# EAGLE board LegoCar1 (EAGLE 7.5.0)
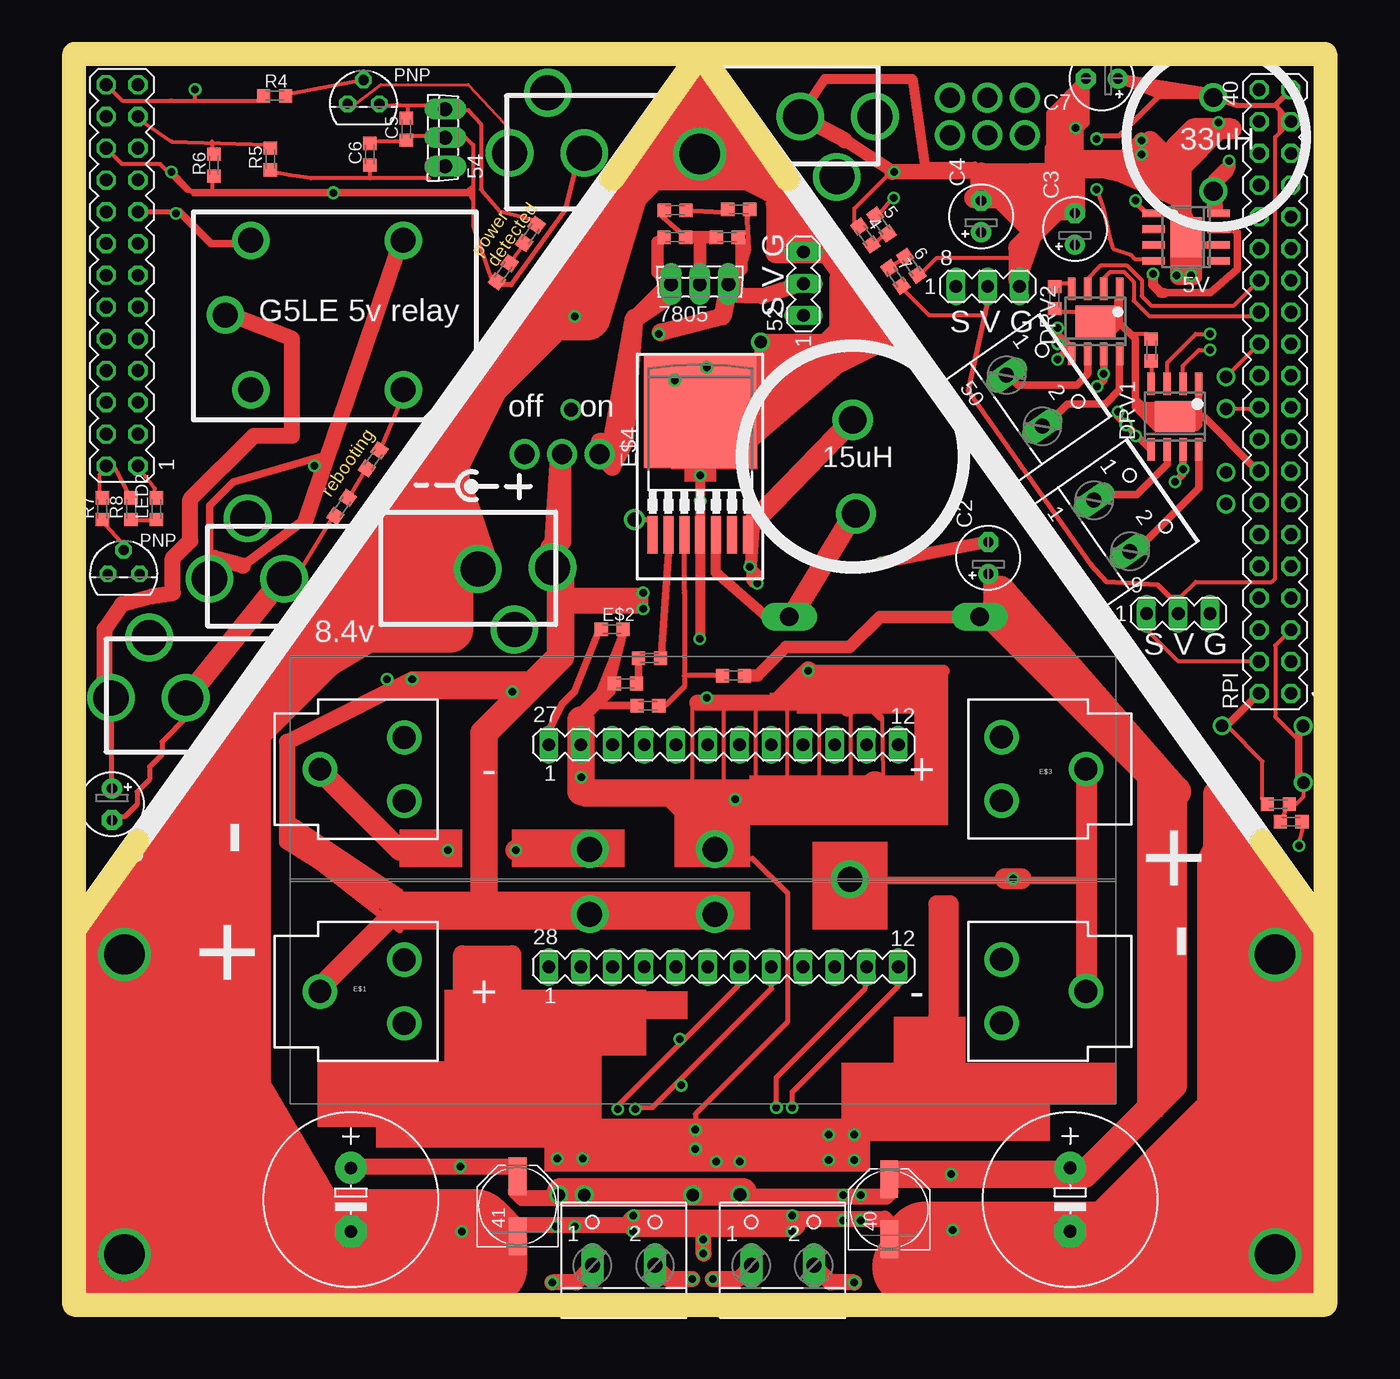
[diagram p0: board, top side]
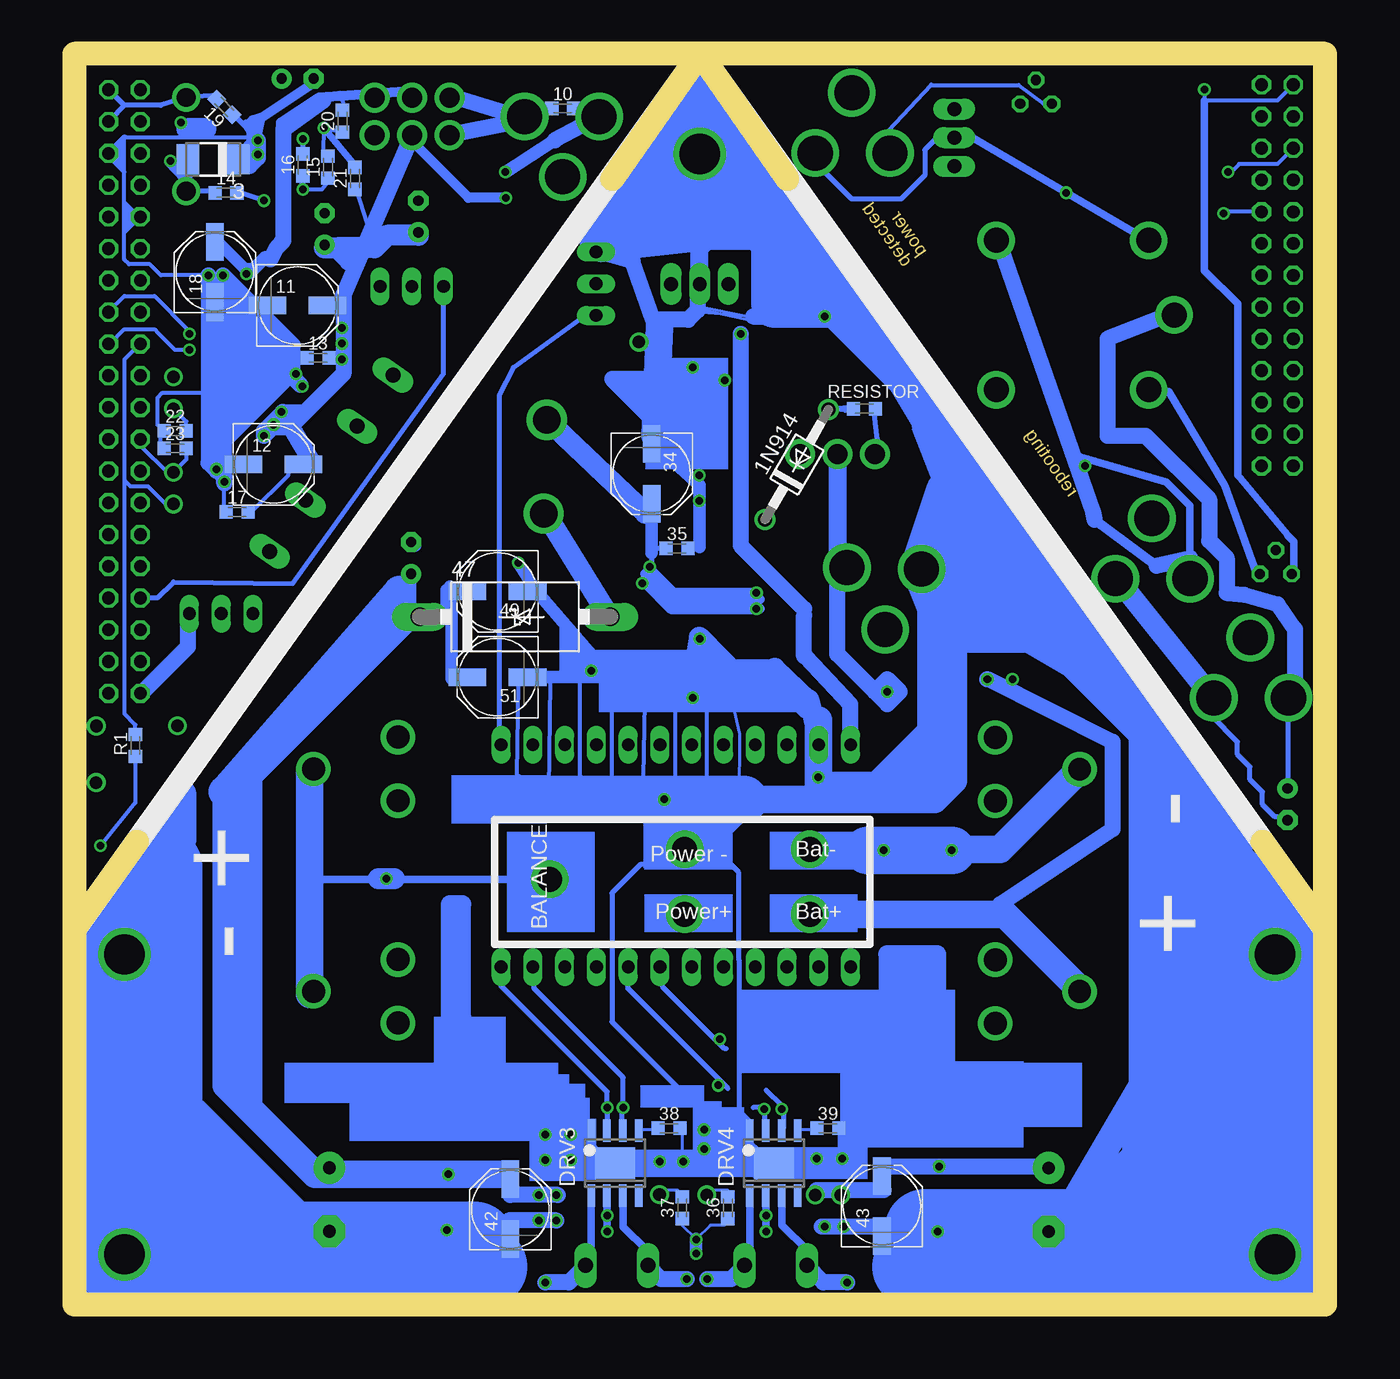
[diagram p1: board, bottom side, seen from below]

Size 100 x 100 mm. Coordinates in mm from the lower left corner, seen from the top.
Outline: 0,30 0,0 100,0 100,30
Outline: 0,30 0,100 50,100
Outline: 50,100 100,100 100,30
Outline: 50,100 43,90
Outline: 50,100 57,90
Outline: 0,30 5,37
Outline: 95,37 100,30
Copper layers (1*16): Top 0.035mm / dielectric 1.5mm / Bottom 0.035mm
Design rules "default": minimum track width 10mil, minimum drill 24mil, track to track 8mil, track to pad 8mil, pad to pad 8mil, via to via 8mil, smd to smd 8mil, copper to edge 40mil, drill to drill 8mil, minimum pad ring 10mil, minimum via ring 8mil, stop-mask expansion 4mil, vias tented up to drill 0mil, thermal gap 10mil
Holes 1 mm at 25,65 76,64

## Footprints (pad centres in the part's own frame; a part is rotated, then mirrored left to right if it is on the bottom)
W237-102 = drill 1.194 long: 1 -2.5,-1.27; 2 2.5,-1.27
DO41-10 = drill 1.118: A 5.08,0; C -5.08,0
DO-214AC = smd 1.8 x 2.4: A 2.025,0; C -2.025,0
C0603K = smd 1.05 x 1.08: 1 -0.875,0; 2 0.875,0
HSOP8 = smd 0.6 x 1.8: 1 -1.905,-2.6; 2 -0.635,-2.6; 3 0.635,-2.6; 4 1.905,-2.6; 5 1.905,2.6; 6 0.635,2.6; 7 -0.635,2.6; 8 -1.905,2.6 | smd 3.2 x 2.51: EXP 0,0
MA03-1 = drill 1.016 long: 1 -2.54,0; 2 0,0; 3 2.54,0
PANASONIC_D = smd 3 x 1.4: + 2.4,0; - -2.4,0
MA12-1 = drill 1.016 long: 1 -13.97,0; 2 -11.43,0; 3 -8.89,0; 4 -6.35,0; 5 -3.81,0; 6 -1.27,0; 7 1.27,0; 8 3.81,0; 9 6.35,0; 10 8.89,0; 11 11.43,0; 12 13.97,0
DO201T15 = drill 1.499 long: A 7.62,0; C -7.62,0
MA13-2 = drill 1.016 octagon: 1 -15.24,-1.27; 2 -15.24,1.27; 3 -12.7,-1.27; 4 -12.7,1.27; 5 -10.16,-1.27; 6 -10.16,1.27; 7 -7.62,-1.27; 8 -7.62,1.27; 9 -5.08,-1.27; 10 -5.08,1.27; 11 -2.54,-1.27; 12 -2.54,1.27; 13 0,-1.27; 14 0,1.27; 15 2.54,-1.27; 16 2.54,1.27; 17 5.08,-1.27; 18 5.08,1.27; 19 7.62,-1.27; 20 7.62,1.27; 21 10.16,-1.27; 22 10.16,1.27; 23 12.7,-1.27; 24 12.7,1.27; 25 15.24,-1.27; 26 15.24,1.27
C369-2 = drill 1.118 long: B -2.286,-1.397; C 0,-1.397; E 2.286,-1.397
E2,5-5 = drill 0.813 pad 1.6: + -1.27,0 | drill 0.813 pad 1.6 octagon: - 1.27,0
BATTERY_18650-HOLDER = drill 1.829: GND@1 30.628,0.01; GND@2 23.88,2.55; GND@3 23.88,-2.53; PWR@1 -30.628,-0.01; PWR@2 -23.88,2.53; PWR@3 -23.88,-2.55
P-TO263-7-1 = smd 0.8 x 3: 1 -3.81,-3.475; 2 -2.54,-3.475; 3 -1.27,-3.475; 4 0,-3.475; 5 1.27,-3.475; 6 2.54,-3.475; 7 3.81,-3.475 | smd 9 x 9: TH 0,6.35
E5-13 = drill 1.016 pad 2.54: + -2.54,0 | drill 1.016 pad 2.54 octagon: - 2.54,0
TO92 = drill 0.813 octagon: 1 -1.27,0; 2 0,1.905; 3 1.27,0
MA20-2 = drill 1.016 octagon: 1 -24.13,-1.27; 2 -24.13,1.27; 3 -21.59,-1.27; 4 -21.59,1.27; 5 -19.05,-1.27; 6 -19.05,1.27; 7 -16.51,-1.27; 8 -16.51,1.27; 9 -13.97,-1.27; 10 -13.97,1.27; 11 -11.43,-1.27; 12 -11.43,1.27; 13 -8.89,-1.27; 14 -8.89,1.27; 15 -6.35,-1.27; 16 -6.35,1.27; 17 -3.81,-1.27; 18 -3.81,1.27; 19 -1.27,-1.27; 20 -1.27,1.27; 21 1.27,-1.27; 22 1.27,1.27; 23 3.81,-1.27; 24 3.81,1.27; 25 6.35,-1.27; 26 6.35,1.27; 27 8.89,-1.27; 28 8.89,1.27; 29 11.43,-1.27; 30 11.43,1.27; 31 13.97,-1.27; 32 13.97,1.27; 33 16.51,-1.27; 34 16.51,1.27; 35 19.05,-1.27; 36 19.05,1.27; 37 21.59,-1.27; 38 21.59,1.27; 39 24.13,-1.27; 40 24.13,1.27

## Placement (x,y rotation side)
1  [W237-102]  84,63 305 top
1N914  [DO41-10]  42.23,67.17 60 bottom
3  [DO-214AC]  88.9,91.57 180 bottom
4  [C0603K]  63.25,85.47 305 top
5  [C0603K]  64.52,86.36 305 top
5V  TPS5410  [HSOP8]  88.89,85.35 90 top
6  [C0603K]  66.93,83.06 305 top
7  [C0603K]  65.66,82.17 305 top
8  [MA03-1]  73.03,81.41 0 top
9  [MA03-1]  88.27,55.24 0 top
10  [C0603K]  60.96,95.63 0 bottom
11  [PANASONIC_D]  82.17,79.88 0 bottom
12  [PANASONIC_D]  84.07,67.18 0 bottom
13  [C0603K]  80.52,75.69 0 bottom
14  [C0603K]  87.88,88.9 0 bottom
15  [C0603K]  79.72,90.94 90 bottom
16  [C0603K]  81.75,91.12 90 bottom
17  [C0603K]  87,63.37 0 bottom
18  [PANASONIC_D]  88.77,82.55 90 bottom
19  [C0603K]  88.01,95.76 135 bottom
20  [C0603K]  78.56,94.62 90 bottom
21  [C0603K]  77.56,90.04 90 bottom
22  [C0603K]  91.95,69.85 0 bottom
23  [C0603K]  91.95,68.45 0 bottom
24  [W237-102]  43.92,4.4 0 top
25  [W237-102]  56.62,4.4 0 top
27  [MA12-1]  51.91,44.77 0 top
28  [MA12-1]  51.91,26.99 0 top
30  [C0603K]  52.2,85.34 0 top
31  [C0603K]  48.01,85.34 0 top
32  [C0603K]  48.04,87.5 0 top
33  [C0603K]  53.12,87.57 0 top
34  470uf  [PANASONIC_D]  53.85,66.42 270 bottom
35  .1uf  [C0603K]  51.82,60.45 0 bottom
36  [C0603K]  47.75,7.75 90 bottom
37  [C0603K]  51.4,7.75 90 bottom
38  [C0603K]  52.45,14.1 0 bottom
39  [C0603K]  39.75,14.1 0 bottom
40  [PANASONIC_D]  65.15,7.62 90 top
41  [PANASONIC_D]  35.43,7.87 90 top
42  [PANASONIC_D]  65.15,7.62 90 bottom
43  [PANASONIC_D]  35.43,7.87 90 bottom
44  3k  [C0603K]  45.97,51.69 0 top
45  .2uf  [C0603K]  44.07,49.66 0 top
46  2k  [C0603K]  45.85,47.88 0 top
47  1n5822  [DO201T15]  64.77,54.99 0 bottom
48  18k  [C0603K]  52.7,50.29 0 top
49  [PANASONIC_D]  66.17,57.02 180 bottom
50  [W237-102]  77,73 305 top
51  [PANASONIC_D]  66.17,50.16 180 bottom
52  [MA03-1]  58.29,81.63 90 top
53  [MA13-2]  3.81,82.3 90 top
54  [C369-2]  28.25,93.31 90 top
60  [C0603K]  34.29,82.54 55 top
61  [C0603K]  36.45,85.59 55 top
62  [C0603K]  23.9,67.57 55 top
67  [C0603K]  21.36,63.78 55 top
7805  [C369-2]  50,83 0 top
C1  [E2,5-5]  3,40 270 top
C2  [E2,5-5]  73.07,59.7 90 top
C3  [E2,5-5]  80,86 90 top
C4  [E2,5-5]  72.5,87 90 top
C5  [C0603K]  26.54,93.98 90 top
C6  [C0603K]  23.63,91.96 90 top
C7  [E2,5-5]  82.15,98.03 180 top
DRV1  [HSOP8]  88,71 0 top
DRV2  [HSOP8]  81.65,78.62 0 top
DRV3  [HSOP8]  56.78,11.31 0 bottom
DRV4  [HSOP8]  44.08,11.31 0 bottom
E$1  [BATTERY_18650-HOLDER]  50.25,25.04 0 top
E$2  [C0603K]  43,54 0 top
E$3  [BATTERY_18650-HOLDER]  50.25,42.82 180 top
E$4  [P-TO263-7-1]  50.04,65.02 0 top
E$8  [E5-13]  79.61,8.4 270 top
E$9  [E5-13]  22.1,8.38 270 top
LED  [C0603K]  97.28,38.61 0 top
LED2  [C0603K]  6.56,63.63 90 top
PNP  [TO92]  3.94,58.42 0 top
PNP2  [TO92]  23.11,96.01 0 top
PULLDOWN  100k  [C0603K]  96.27,40.01 0 top
R1  220ohm  [C0603K]  95.12,44.7 90 bottom
R2  [C0603K]  86.11,76.33 90 top
R3  [C0603K]  78.36,80.52 90 top
R4  [C0603K]  16,96.65 0 top
R5  [C0603K]  15.66,91.6 90 top
R6  [C0603K]  11.16,91.1 90 top
R7  [C0603K]  2.22,63.63 90 top
R8  [C0603K]  4.53,63.63 90 top
RESISTOR  [C0603K]  36.83,71.63 0 bottom
RPI  [MA20-2]  96,73 90 top

## Library data of the parts
1 24 25 50 = con-wago-500
1N914 3 47 = diode
4-7 LED PULLDOWN R1-R3 = resistor
5V DRV1-DRV4 = st-microelectronics
8 9 27 28 52 53 RPI = con-lstb
10 13-17 19-23 30-33 54 7805 E$2 LED2 R5-R8 RESISTOR = ref-packages
11 12 18 34-43 49 51 60-62 67 C1-C7 E$8 E$9 R4 = rcl
44-46 48 = ref-packages-longpad
E$1 E$3 = SparkFun-Electromechanical
E$4 = led
PNP PNP2 = linear

## Nets
S$70: 9.1
S$195: 52.2
S$249: E$8.-
S$287: 47.C

## Tracks (layer width: path | path; a pad name or v marks a point on that pad's centre or on a via)
GROUND
  Top 1.27: 82.42,90.68 81.75,90.68 65.41,90.55
S$1
  Bottom 0.254: 45.99,78.95 49.96,79.74
S$2  (via drill 3.2)
  other vias: 96,28
S$3  (via drill 3.2)
  Top 6.452: 67,3 97,3 v96,4 96,30 93,33 | 93,33 93,35 | 93,33 93,12 92,13 92,14 83,5 68,5 69,4 87,4 92,9 93,9
  Bottom 6.452: 95.89,28.07 96,27.95 96,5 | 96,5 v96,4 95,3 67,3 | 93,9 93,14 | 93,25 93,35 95,33 95,30 96,29 97,29 93,25 | 93,25 93,14 | 93,14 92,14 83,5 | 83,5 68,5 | 83,5 96,5
S$4  (via drill 3.2)
  other vias: 4,4
S$5  (via drill 3.2)
  other vias: 4,28
S$6
  Top 0.305: 97.28,53.98 96.01,52.7 96.01,46.99 97.79,45.21 97.79,45.85 98.17,46.23
S$7
  Top 0.61: 89.92,72.77 89.92,72.39 | 89.92,72.39 89.92,70.36 89.66,70.1 | 89.66,70.36 89.66,72.14 89.92,72.39
S$8
  Top 0.61: 83.44,80.26 83.44,78.23 82.93,77.72
S$9
  Top 0.61: 86.61,70.74 86.49,70.74 84.84,72.39 | 83.57,80.39 83.57,78.49 84.84,77.22 84.84,72.39 | 84.84,72.39 84.84,71.75 86.49,70.1
S$10
  Top 0.61: 85.47,71.88 86.74,71.88 86.23,71.37
S$11
  Top 0.61: 94.61,66.93 94.36,66.93 90.3,70.99 89.92,70.99 89.79,70.87
S$12
  Top 0.61: 97.92,45.59 97.92,42.16
S$13
  Top 0.61: 91.82,46.23 92.08,46.23 94.74,48.9
S$14
  Top 0.61: 94.74,48.51 95,48.51
S$15
  Top 0.305: 98.04,42.16 98.04,41.78 98.17,41.66
S$16
  Bottom 0.305: 93.34,70.36 93.34,72.52 92.96,72.9 89.53,72.9
S$17  (via drill 0.6)
  Top 0.305: v97.92,36.7 98.3,38.35
  Bottom 0.305: 95.12,43.31 95.12,40.13 v97.92,36.7
S$18
  Top 0.305: 96.52,38.73 96.9,39.62 97.66,40.01 98.3,40.64 98.3,41.53
S$19
  Top 0.305: 95,40.39 95,43.43 92.33,46.1
S$20
  Top 0.305: 78.74,79.38 80.64,79.38
S$21
  Top 0.305: 78.74,81.66 79.76,81.66
S$22
  Top 0.305: 85.72,77.6 84.33,77.6
S$23
  Top 0.305: 86.11,75.06 86.11,74.3
S$24  (via drill 0.6)
  Top 0.61: 88.65,67.56 88.65,66.42 v88.01,65.79
  Bottom 0.406: 81.66,75.69 82.55,75.69
  Bottom 1.27: 88.01,65.66 88.01,66.17 v88.65,66.8 88.65,68.45 88.01,69.09 | v88.01,65.79 88.01,69.09 | 88.01,69.09 82.55,74.55 | 82.55,74.55 82.55,74.17 81.92,73.53 | 82.55,74.55 82.55,75.69 82.55,76.71 v88.14,82.3
S$25  (via drill 0.6)
  other vias: 82.3,74.42
S$26  (via drill 0.6)
  Top 0.61: 82.3,75.18 82.3,73.91 v81.79,73.41
S$27
  Top 1.016: 65.66,90.55 78.06,90.55 | 78.06,90.55 82.68,90.55 | 78.06,92.46 78.06,90.55
S$28
  Top 0.61: 83.57,75.18 83.57,73.15 82.42,72.01 79.38,72.01 78.11,70.74
S$29
  Top 0.61: 81.03,75.06 81.03,74.42 80.14,73.53 75.44,73.53 74.8,74.17
S$30
  Top 0.61: 89.92,67.56 89.92,65.28 85.6,60.96
S$31
  Top 0.61: 87.38,67.56 87.38,67.18 84.96,64.77 82.04,64.77 81.53,64.26
S$32
  Top 1.27: 82.55,90.68 83.57,90.42 88.01,88.52 89.03,86.49
S$33  (via drill 0.6)
  other vias: 84.07,70.36
S$34  (via drill 0.6)
  Top 0.61: v83.44,71.37 83.44,70.99 85.98,68.45
S$35  (via drill 0.6)
  Bottom 1.27: 72.98,93.61 78.49,80.77 78.49,74.42 81.53,71.37 | 81.53,71.37 82.8,70.1 84.2,70.1 v84.84,69.47 84.84,69.85 83.31,71.37 81.53,71.37
S$36  (via drill 0.6)
  Top 0.61: v78.61,78.11 78.61,77.6 79.38,76.83 | v78.61,75.56 79.63,76.58 79.38,76.83 | v78.61,76.83 79.38,76.83
S$37  (via drill 2.8)
  Top 1.016: 65.53,90.55 61.59,93.09
  Top 1.27: 61.59,93.09 v58.04,95
  Bottom 1.016: 61.59,93.09 65.53,90.55
  Bottom 1.27: v58.04,95 61.59,93.09
S$38
  Bottom 1.27: 64.26,94.49 65.02,94.49 | 65.02,94.49 70.03,93.49 | 65.02,94.49 64.52,95 69.49,96.5 70.27,96.27
S$39  (via drill 0.6)
  other vias: 65.53,90.55
S$40
  Bottom 0.305: 82.93,66.67 82.93,66.29 85.85,63.37
S$41
  Top 1.27: 88.27,82.42 88.27,84.07
S$42
  Top 0.305: 82.17,81.92 82.8,82.55 83.95,82.55 84.71,81.79 84.71,80.26 85.22,79.76 85.34,79.63 85.98,78.99 94.49,78.99
S$43
  Top 1.27: 89.53,82.3 89.53,83.95
S$44  (via drill 0.6)
  Bottom 0.305: v89.28,82.3 93.09,82.3 93.98,83.19 95.63,83.19 96.01,83.57 96.01,85.72 | 96.01,88.14 96.01,90.55 | 96.01,90.55 97.41,91.95 | 96.01,90.55 96.01,93.34 | 94.87,86.87 94.74,86.87 96.01,88.14 | 94.87,86.87 96.01,85.72 | 96.01,85.72 96.01,88.14 | 94.87,86.87 95.12,86.87 95.89,87.63 95.89,86.23 95.76,86.11 95.76,86.36 95.25,86.87 95.63,87.25 95.63,86.74 95.76,86.61 95.63,86.61 95.38,86.87 95.5,87 95.63,87 95.76,86.87
  Bottom 0.406: 96.01,93.34 97.41,91.95
  Bottom 1.27: v89.28,82.3 89.28,67.31 88.65,66.67 88.65,81.79 88.77,81.92 88.77,81.53 83.44,76.2 83.44,74.93 88.14,70.23 88.14,79.25 87.88,79.5 87.88,79.12 84.33,75.56 84.33,75.06 87.5,71.88 87.5,77.09 87.25,77.34 87.25,77.09 85.47,75.31 85.47,75.06 86.87,73.66 86.87,75.18 86.36,75.69
S$45
  Top 1.27: 89.53,82.17 88.27,82.17
S$46
  Top 0.61: 90.68,84.71 89.53,84.71
S$47
  Top 0.61: 92.2,85.98 92.71,85.98 92.96,85.72 92.96,82.8 90.81,80.9 87.12,80.9 | 86.87,80.9 86.74,80.9
  Top 0.813: 86.23,82.3 86.23,81.53 86.87,80.9 87.12,80.9
S$48
  Top 0.305: 80.9,81.92 82.04,83.06 84.2,83.06 85.34,81.92 85.34,80.64 86.11,79.88 92.71,79.88 94.61,81.79
S$49
  Bottom 1.27: 84.33,83.57 83.78,84.57 83.27,85.07 83.27,93.98 80.1,96.27
S$50  (via drill 0.6)
  Bottom 0.813: 86.36,82.42 v86.23,82.42 | v86.23,82.42 85.85,82.42 84.45,83.82 | 84.45,83.82 83.53,85.32 | 84.45,83.82 84.84,83.82 85.85,82.8 v86.23,82.42
  Bottom 1.016: 85.85,82.8 86.36,82.8 88.9,85.34
S$51
  Bottom 0.305: 88.01,63.5 88.01,65.53
S$52  (via drill 0.6)
  Top 0.61: v80.06,94.08 75.56,81.15
  Bottom 0.305: 80.1,92.08 v80.06,94.08 78.56,93.73
  Bottom 0.61: v80.06,94.08 77.56,91.06
S$53
  Top 1.676: 88.5,91 91.5,94
S$54
  Top 0.406: 88.14,56.52 87.63,56.52 86.61,57.53 82.55,57.78 81.28,59.18 71.5,73.03 73.03,80.14
S$55  (via drill 0.6)
  other vias: 85.34,91.95
S$56  (via drill 0.6)
  Top 1.27: 85.09,89.92 v85.34,93.09
  Bottom 1.27: v85.34,93.09 85.34,91.69 85.98,91.06 85.98,92.46 v85.34,93.09
S$57
  Bottom 1.27: 90.93,54.23 90.93,52.58 94.74,48.77
S$58
  Top 0.305: 88.39,56.52 89.66,57.78 95.76,57.78 96.01,58.04 96.01,93.34 96.9,94.23
S$59  (via drill 0.6, 1.5)
  Top 1.016: v92.33,91.44 92.33,90.93 91.31,89.92
  Top 1.27: 91.19,87.76 91.19,89.79 91.31,89.92 92.08,90.68
  Bottom 0.406: 91.57,91.44 v92.33,91.44 | 89.15,89.03 v91.06,89.03
  Bottom 1.016: v91.06,89.03 91.06,90.04 v92.33,91.44
S$60
  Bottom 0.305: 96.14,92.84 96.27,92.84 97.16,91.95 96.14,90.93 96.14,92.71 96.9,91.95 96.77,91.95 96.27,91.44 96.27,92.2 96.39,92.33 96.39,92.08 96.52,91.95 96.52,91.82
S$61  (via drill 0.6)
  Bottom 0.406: v84.84,88.27 86.74,88.9
S$62
  Top 0.254: 85.98,82.17 85.85,82.17
S$63
  Bottom 0.406: 62.1,95.63 63.12,95.63
S$64
  Bottom 0.406: 59.69,95.63 58.55,95.63
S$65
  Bottom 0.61: 58.67,7.87 58.67,4.06
S$66
  Bottom 0.61: 56.13,7.87 56.13,6.22 54.23,4.32
S$67
  Bottom 1.422: 80.9,67.18 83.31,71.25
S$68
  Bottom 0.406: 79.38,75.82 78.36,75.82
S$69
  Top 0.406: 84.71,88.27 85.72,87.25
S$70
  Top 0.305: 94.49,51.44 88.27,51.44 85.72,53.98 9.1
S$71  (via drill 0.6)
  Bottom 0.406: v81.75,93.22 81.75,92.2
S$72
  Bottom 0.305: 97.28,79.38 96.01,80.64 93.6,80.64 90.81,77.85 90.81,77.47
S$73
  Bottom 0.406: 85.47,93.34 87.12,95
S$74  (via drill 1.5)
  Top 0.406: 81.75,93.47 83.57,93.47 86.74,96.65 v91.06,96.52
  Bottom 0.406: 88.77,96.65 89.03,96.65 v91.06,96.52
S$75  (via drill 0.6)
  Top 0.305: 87.38,74.42 87.38,75.31 89.66,77.6 v90.81,77.6
S$76  (via drill 0.6)
  Top 0.305: 88.65,74.42 88.65,75.06 89.92,76.33 v90.81,76.33
  Bottom 0.305: 97.16,76.83 96.01,77.98 93.6,77.98 93.34,77.72 91.95,76.33 v90.81,76.33
S$77  (via drill 0.6)
  Top 0.305: v81.75,89.15 82.27,87.63 82.77,85.21 83.03,84.45 84.45,83.95 84.84,83.57 85.6,83.57
  Bottom 0.305: 79.72,90.42 79.72,89.79 80.22,89.15 v81.75,89.15
  Bottom 0.406: 81.75,89.79 v81.75,89.15
S$78
  Bottom 0.305: 81.88,90.17 81.88,89.15
S$79
  Bottom 0.406: 94.74,56.52 93.34,56.52 92.08,57.78 82.55,57.66 70.48,74.42 70.48,80.39
S$80
  Bottom 0.305: 95.89,93.34 85.72,93.34
S$81
  Bottom 0.305: 77.45,89.27 77.45,89.02 76.35,85.61
S$82
  Bottom 0.305: 78.45,95.89 78.72,96.89 80.35,96.52
S$83
  Top 0.305: 66.29,81.15 68.33,79.12 72.77,79.12
S$84
  Top 0.305: 65.53,83.19 65.79,83.31 66.17,83.57
S$85
  Top 0.305: 67.69,82.55 67.82,82.55 68.96,83.69 75.94,83.69
S$86
  Top 0.305: 65.02,85.6 65.02,85.47 64.64,85.47 63.88,84.71
S$87
  Top 0.305: 62.36,86.49 62.36,87.63 65.28,90.55
S$88
  Top 0.305: 64.39,87.25 65.64,88.75
S$89  (via drill 1)
  other vias: 92.08,64.01
S$90  (via drill 1)
  Bottom 0.305: 91.06,68.07 91.06,67.56 v92.08,66.55 92.58,66.55 94.61,68.58
S$91
  Top 0.305: 92.08,74.42 92.33,74.42 94.74,76.83
S$92  (via drill 1)
  Top 0.305: v92.08,71.63 94.74,71.63
  Bottom 0.305: 91.06,69.98 91.06,70.61 v92.08,71.63
S$93  (via drill 1)
  other vias: 92.08,74.17
S$94
  Bottom 0.305: 92.08,63.88 92.58,63.88 94.11,65.41 95.5,65.41 96.01,65.91 | 94.74,76.83 96.01,75.56 96.01,65.91 | 96.01,65.91 96.01,47.24 95.12,46.35 95.12,45.97
S$95
  Bottom 0.305: 93.09,68.2 93.09,69.47
S$96
  Bottom 0.61: 45.97,7.87 45.97,4.06
S$97
  Bottom 0.61: 43.43,7.87 43.43,6.35 41.4,4.32
S$98
  Bottom 0.61: 58.67,13.08 58.67,12.7 | 58.67,12.7 58.67,10.79 58.29,10.41 58.29,12.32 58.67,12.7
S$99
  Bottom 0.61: 45.97,12.95 45.97,12.83 | 45.97,12.83 45.97,10.79 45.47,10.29 45.47,12.32 45.97,12.83
S$100  (via drill 0.6)
  other vias: 44.7,7.11
S$101  (via drill 0.6)
  Bottom 0.61: 44.7,8.26 v44.7,5.84
S$102  (via drill 0.6)
  other vias: 57.4,7.11
S$103  (via drill 0.6)
  Bottom 0.61: v57.4,5.84 57.4,8.26
S$104  (via drill 2)
  other vias: 62,34
S$105  (via drill 2)
  other vias: 51.2,36.4
S$106  (via drill 2)
  other vias: 51.2,31.2
S$107  (via drill 2)
  Bottom 2.184: v41.2,31.2 25.6,31.2 19.6,25.2
S$108  (via drill 2)
  Bottom 2.184: v41.2,36.4 26,36.4 19.6,42.8
S$109
  Bottom 0.61: 65.2,34 81.2,34 81.2,42.4
  Bottom 2.184: 81.2,42.4 81.2,24.8
S$110
  Bottom 2.184: 50.8,36.83 49.78,36.83 46.23,40.39 31.24,40.39 29.72,41.91 29.72,54.86 32.13,59.82
S$111
  Top 2.184: 50.93,31.11 47.88,31.11
S$112
  Top 2.184: 51.18,31.24 32.77,31.24 32.77,45.72 38.86,51.82 38.86,59.18
S$113  (via drill 2.8)
  Top 1.422: 38.73,67.79 38.23,60.33
  Top 1.93: v38.23,58.93 38.23,60.33 38.23,60.45
S$114
  Top 1.016: 61.99,62.72 62.99,64.01
  Top 1.676: 57.66,55.5 61.99,62.72
  Bottom 1.016: 62.61,62.74 62.25,63.1 | 57.4,55.24 57.15,55.24
  Bottom 1.676: 62.25,63.1 57.4,55.24
S$115
  Bottom 1.676: 50.04,53.34 50.55,50.29 | 41.28,48.34 40.55,45.29 | 50.04,53.36 47.03,50.3 | 43.99,50.86 41.33,48.36 | 43.99,50.1 41.33,47.59
S$116
  Bottom 1.422: 31.88,69.72 34.16,73.53 45.85,85.22 49.28,85.22 50.04,84.45 50.04,81.66
S$117
  Top 1.422: 44.83,78.74 47.75,81.66
S$118
  Top 1.422: 52.32,81.53 51.82,78.99 46.86,77.72
S$119
  Bottom 1.27: 41.53,51.82 37.97,48.01 37.97,45.34
S$120
  Top 1.016: 50.04,85.34 50.04,82.68 | 50.04,85.34 50.67,85.34 | 50.04,85.34 49.4,85.34
S$121
  Top 1.016: 53.34,84.84 53.34,82.8 52.7,82.17
S$122
  Top 0.406: 38.3,60.5 38.3,66.2 38.7,66.8
S$123  (via drill 0.6)
  Bottom 1.422: 40.51,44.7 v40.51,42.16 40.51,40.51
S$124  (via drill 1.6)
  other vias: 36,68
S$125  (via drill 1.6)
  Top 1.422: 43,67 43,68 | 43,67 44,69 43,69 | 43,69 44.75,78.87 | 43,69 42,69 v42,68 43,67
S$126
  Bottom 1.676: 89.5,94 91,94
S$127
  Top 1.676: 92.5,94 89.5,94 88,92.5
S$128
  Bottom 1.676: 30.5,59 30.5,65.9 32.23,70.3
S$129  (via drill 0.6)
  Bottom 0.813: 41.66,55.12 41.66,55.63
  Bottom 1.27: v46.74,77.6 46.74,60.71 41.66,55.63 | 41.66,51.82 41.66,55.12
S$130
  Top 1.016: 46.61,84.96 46.61,82.55 46.99,82.17
S$131
  Top 0.406: 47.02,87 49.02,85.22
S$132
  Top 0.406: 53.72,87.5 53.88,84.34 52.88,80.82 | 48.72,87.5 51.88,87.34
S$133  (via drill 0.6)
  other vias: 57.4,15.75
S$134  (via drill 0.6)
  Bottom 0.406: v56.13,15.75 56.13,18.16 63.25,25.27 63.25,26.16
S$135  (via drill 0.6)
  Bottom 0.406: v44.83,15.62 44.83,14.1 44.7,13.97
S$136  (via drill 0.6)
  other vias: 43.43,15.62
S$137
  Top 0.406: 57.4,15.88 57.4,17.02 65.91,25.53 65.91,26.54
S$138
  Top 0.406: 56.13,15.88 56.13,18.16 63.25,25.27 63.25,26.67 63.37,26.8
S$139
  Top 0.406: 44.83,15.75 46.23,15.75 55.75,25.27 55.75,26.67 55.88,26.8
S$140
  Top 0.406: 43.31,15.75 53.09,25.53 53.09,26.54 53.21,26.67
S$141
  Bottom 0.406: 43.31,15.62 43.31,14.1 43.43,13.97
S$142
  Bottom 0.406: 56.26,15.62 56.26,14.1
S$143
  Bottom 0.406: 57.4,15.62 57.4,14.1
S$144
  Top 0.406: 38.73,66.92 39.23,68.33 39.1,67.96
S$145
  Bottom 0.406: 90.93,96.65 91.06,96.52 93.09,95.89 96.01,95.89 | 96.01,95.89 97.16,97.03 | 96.01,95.89 97.16,94.74
S$146
  Bottom 0.406: 35.66,68.96 35.66,68.1 36.07,71.5
S$147
  Bottom 0.406: 38.35,71.5 39.62,71.63 37.97,71.75
S$148  (via drill 0.6)
  Bottom 0.406: 50.04,65.53 50.04,65.66
  Bottom 1.016: 53.85,68.96 50.04,65.53 v50.04,64.26 50.04,60.58
S$149
  Bottom 1.016: 69.98,57.4 70.23,57.15 70.23,55.24
S$150
  Top 0.406: 54.1,62.61 54.1,62.23 | 54.1,62.1 54.1,62.23 | 54.1,62.23 53.85,62.48
S$151
  Bottom 0.406: 53.09,60.45 53.59,60.45 53.85,60.2 53.85,60.07 53.85,58.8
  Bottom 1.016: 53.85,60.07 53.85,63.63
S$152
  Bottom 0.406: 50.16,60.45 50.67,60.45
S$153  (via drill 1)
  other vias: 91.76,46.28
S$154  (via drill 1)
  other vias: 98.25,46.26
S$155  (via drill 1)
  other vias: 98.26,41.74
S$156
  Bottom 0.406: 47.62,35.31 46.86,34.54 46.86,27.69 46.86,27.56 46.86,15.49 45.97,14.61
S$157
  Bottom 2.184: 44.07,11.3 56.77,11.3
S$158
  Top 2.184: 57.4,6.48 44.83,6.48
S$159  (via drill 1)
  other vias: 53.22,8.79
S$160  (via drill 1)
  other vias: 49.44,8.76
S$161  (via drill 1)
  other vias: 40.77,8.76
S$162  (via drill 1)
  other vias: 38.73,8.76
S$163
  Top 2.184: 53.47,9.02 38.86,9.02
S$164  (via drill 0.6)
  Top 0.254: 50.29,3.94 50.29,6.1
  Bottom 0.254: 48.01,6.35 49.15,6.35 v50.29,5.21 50.29,3.94 | 51.46,6.39 50.32,5.25
S$165  (via drill 0.6)
  other vias: 50.29,4.06
S$166
  Bottom 0.254: 51.75,9.14 52.83,9.14 | 47.75,9.14 49.96,9.14
S$167
  Bottom 0.254: 51.44,13.59 51.44,11.56
S$168
  Bottom 0.254: 38.86,13.59 38.86,12.57 38.99,12.45 42.93,12.45
S$169
  Bottom 0.254: 41.15,13.97 42.29,13.97
S$170
  Bottom 0.254: 53.47,13.97 54.74,13.97
S$171
  Top 1.27: 44.58,6.35 35.69,6.35
S$172
  Top 1.27: 38.73,8.51 35.81,8.51 35.31,9.02
S$173
  Top 1.27: 57.4,6.86 64.77,6.86 65.28,6.35
S$174
  Top 1.27: 53.72,8.64 64.9,8.64 65.28,9.02
S$175
  Bottom 1.27: 35.31,9.14 40.64,9.14
S$176  (via drill 0.6)
  Bottom 1.27: 35.31,6.22 v38.48,6.22 v40.01,6.22 40.26,6.22
S$177  (via drill 0.6)
  Bottom 1.27: v61.47,6.73 65.28,6.73
S$178  (via drill 0.6)
  other vias: 62.87,6.73
S$179  (via drill 0.6)
  other vias: 62.87,8.76
S$180  (via drill 0.6)
  other vias: 61.47,8.76
S$181
  Bottom 1.27: 61.34,8.76 65.15,8.76
S$182
  Top 0.61: 40.39,45.97 40.39,47.37 40.89,47.88 | 40.89,47.88 42.67,49.66 43.31,49.66 | 44.7,47.88 40.89,47.88
S$183
  Top 0.61: 45.09,51.56 45.09,49.91
S$184
  Top 0.61: 46.99,51.69 46.99,52.7 47.5,60.07
S$185
  Top 0.406: 48.77,50.29 48.77,56.9 48.77,57.15 48.77,59.94 | 48.77,50.29 48.77,49.4 47.24,47.88 46.61,47.88 | 51.44,50.29 48.77,50.29
S$186  (via drill 0.6)
  other vias: 50.55,48.51
S$187
  Top 0.813: 55.37,54.99 51.31,58.55
S$188
  Top 1.016: 54.36,62.61 54.1,59.18
  Top 1.676: 62.36,70.87 54.36,62.61
S$189
  Bottom 1.016: 50.42,51.05 50.55,50.93 57.91,51.05 62.74,56.64
S$190
  Top 0.813: 78.11,92.71 78.11,95.25 80.77,97.92 80.77,94.49 80.26,93.98 80.26,91.82 79.63,91.82 78.61,92.84 78.61,95.12 80.39,96.9 80.39,94.23 78.99,92.84 79.38,92.84 79.88,92.33 79.88,95.5 | 79.88,95.89 79.88,95.5 | 79.88,95.5 79.12,94.74 79.12,93.34
S$191
  Bottom 1.016: 50.8,50.04 50.93,50.16 62.61,50.16
S$192
  Bottom 1.016: 69.85,56.77 69.85,50.04
S$193  (via drill 0.6)
  Top 2.184: 65.66,10.41 v70.1,10.41 80.77,10.41 87.88,17.53 87.88,40.51 73.41,54.99
  Bottom 2.184: 73.41,54.99 87.88,40.51 87.88,17.53 80.77,10.41 v70.1,10.41 65.66,10.41
S$194  (via drill 0.6)
  Top 2.184: 32,58.67 27.69,58.67 14.61,45.59 14.61,17.53 21.46,5.84 v30.99,5.84 34.67,5.84
  Bottom 2.184: 34.67,5.84 v30.99,5.84 21.46,5.84 14.61,17.53 14.61,45.59 27.69,58.67 31.88,58.67
S$195
  Top 1.27: 52.2 55.01,80.63 52.09,80.72
S$196
  Bottom 1.27: 49.91,81.28 50.16,81.03 50.16,79.5 50.93,78.74 53.72,78.74 55.37,83.41 58.17,84.17
S$197
  Top 1.016: 70.48,54.99 64.39,54.99 61.98,52.58 56.9,52.58 54.61,50.29 54.23,50.29
S$198
  Top 0.305: 2.79,97.28 3.81,96.27 7.62,96.27 7.75,96.27 14.86,96.27
S$199
  Top 0.305: 31.11,93.47 31.88,92.71
S$200
  Bottom 0.305: 34.92,93.85 31.5,97.54
S$201
  Top 0.305: 24.51,95.89 26.67,95.89 | 26.67,95.89 29.21,95.89 29.34,95.76 | 26.67,95.25 26.67,95.89
S$202
  Top 0.305: 28.32,90.06 23.63,90.06 | 23.63,90.06 18.91,90.06 17.16,90.31 15.66,90.58 | 23.63,90.06 23.63,90.95
S$203
  Top 0.305: 5.59,94.5 7.78,93 15.53,92.74
S$204
  Top 0.254: 22.35,95.89 24.51,97.54 31.5,97.54 34.92,93.85
S$205
  Top 0.305: 26.54,92.97 24.01,92.97
S$206
  Top 0.305: 26.8,93.47 28.96,93.47
S$207
  Top 0.305: 16.96,96.77 22.84,97.89
S$208
  Bottom 0.305: 31.5,97.5 24.5,97.5 22.5,96 22,96
S$209
  Top 0.305: 31.24,95.5 31.5,95.5 32.51,94.36 32.51,89.15 34.04,87.38 36.96,86.61
S$210
  Top 0.305: 35.05,83.57 35.81,84.58
S$211
  Top 1.27: 8.78,48.4 8.91,48.4
  Top 1.676: 8.91,48.4 16.89,58.39
  Bottom 1.676: 16.89,58.39 8.78,48.28
S$212
  Top 0.305: 2.03,64.77 2.03,66.42 2.41,66.8
S$213
  Top 0.305: 4.91,62.74 6.44,62.74
S$214
  Top 0.305: 6.44,64.9 6.44,65.28 5.33,66.67
S$215
  Top 0.305: 2.92,67.44 4.31,64.83
S$216
  Top 0.305: 2.48,62.36 4.07,60.59
S$217  (via drill 0.6)
  Top 0.305: 9.65,96.39 v9.65,97.16
S$218
  Top 0.813: 58,95 60,98 67,98 68,91 72,91
S$219
  Bottom 0.61: 12.5,73 8,65.5 5.5,58.5
S$220
  Top 1.27: 2.41,50.04 2.41,53.98 3.81,56.01 6.22,56.64 7.87,56.9 7.87,59.69 9.27,61.09 9.27,64.39 14.35,69.47 17.4,69.47 17.4,77.22 12.57,79.12
S$221
  Top 0.406: 5.33,87.38 8.38,87.38
  Top 0.61: 8.38,87.38 10.92,84.84 13.08,84.84
S$222
  Bottom 0.305: 2.79,97.28 3.81,96.27 9.65,96.27 9.65,97.28
  Bottom 0.61: 9.65,96.27 9.65,82.68 6.99,80.02 6.99,66.34 2.81,61.33
S$223
  Top 0.813: 13.48,59.07 18.56,62.87
  Top 1.27: 11.18,59.69 13.48,59.07 | 18.56,62.87 26.16,85.09
S$224
  Bottom 1.27: 12.57,79.12 17.4,77.22 17.4,69.47 14.35,69.47 9.27,64.39 9.27,61.09 7.87,59.69 7.87,56.9 6.48,56.77 3.81,56.01 2.41,53.98 2.41,49.15 2.54,49.02
S$225
  Bottom 0.813: 18.43,62.75 13.48,59.07
  Bottom 1.27: 26.16,85.09 18.56,63.37 18.43,62.75 | 13.48,59.07 10.79,59.69
S$226
  Top 0.61: 19.56,67.77 12.68,65.77 10.79,63.88 10.79,59.69
  Bottom 0.61: 10.79,60.2 10.79,63.88 12.68,65.77 19.56,67.77
S$227
  Top 0.61: 62.36,33.91 81.41,33.91
S$228
  Top 1.676: 80.9,42.67 80.9,25.02
S$229  (via drill 0.6)
  Top 1.676: 19.56,42.93 19.56,42.8 26.04,36.32 v29.84,36.32 29.97,36.32
  Bottom 3.81: v29.84,36.32 36.58,36.32
S$230
  Top 1.676: 19.43,25.02 19.43,25.15 25.53,31.24 40.89,30.99
S$231  (via drill 0.6)
  Top 1.676: v35.31,36.32 41.27,36.32
S$232  (via drill 0.6)
  Top 1.676: 51.31,36.7 51.31,38.86 v52.83,40.39
  Bottom 1.676: v52.83,40.39 51.18,38.73 51.18,36.58 51.31,36.45
S$233  (via drill 0.6)
  other vias: 75.06,34.04
S$234
  Top 1.676: 75.69,34.04 74.42,34.04
  Bottom 1.676: 74.42,34.04 75.69,34.04
S$235
  Bottom 0.406: 57.4,15.88 57.4,17.02 65.91,25.53 65.91,26.54
S$236
  Bottom 0.406: 47.75,17.27 55.75,25.27 55.75,25.78
S$237
  Bottom 0.406: 47.88,20.45 48.01,20.45 52.96,25.4 52.96,26.16 53.09,26.29
S$238
  Bottom 0.406: 43.43,15.88 44.7,17.14
S$239
  Bottom 0.406: 44.96,15.75 45.72,15.75
S$240  (via drill 0.6)
  other vias: 48.39,21.21
S$241  (via drill 0.6)
  other vias: 48.51,17.53
S$242
  Top 1.27: 40.51,44.2 40.51,41.27 40.89,40.89 41.15,40.64 47.37,40.64 51.05,36.96
  Top 2.184: 40.89,40.89 63.37,40.89 64.01,41.53
S$243  (via drill 0.6)
  Top 1.27: v49.4,2.03 47.5,2.03 46.48,3.05
  Bottom 1.27: 46.48,3.05 47.5,2.03 v49.4,2.03
S$244  (via drill 0.6)
  Top 1.27: 54.1,3.05 53.09,2.03 v51.05,2.03
  Bottom 1.27: v51.05,2.03 53.09,2.03 54.1,3.05
S$245  (via drill 0.6)
  Top 1.27: 41.4,3.05 40.13,1.78 v38.23,1.78
  Bottom 1.27: v38.23,1.78 40.13,1.78 41.4,3.05
S$246  (via drill 0.6)
  Top 1.27: v62.36,1.78 60.45,1.78 59.05,3.17
  Bottom 1.27: 59.05,3.17 60.45,1.78 v62.36,1.78
S$247  (via drill 0.6)
  Top 1.27: 22.23,11.05 v30.86,11.05 35.31,11.05
  Bottom 1.27: 35.31,11.05 v30.86,11.05 22.23,11.05
S$248  (via drill 0.6)
  other vias: 70.23,5.97
S$249
  Top 1.27: 65.15,5.97 E$8.-
  Bottom 1.27: 80.52,5.97 65.15,5.97
S$250  (via drill 0.6)
  Top 0.406: 52.32,35.69 54.23,35.69 57.02,32.89 57.02,22.61 49.66,15.24 v49.66,13.97 v49.66,12.45 49.66,11.81
  Bottom 0.406: 53.85,35.18 54.74,35.18 57.02,32.89 57.02,22.61 49.66,15.24 v49.66,13.97 v49.66,12.45 49.66,11.56
S$251
  Top 0.406: 9,47 7,45 7,44 6,43 6,42 5,41 5,40 4,39 3,39
  Bottom 0.406: 3,39 4,39 5,40 5,41 6,42 6,43 7,44 7,45 9,47
S$252
  Top 0.406: 3,41 3,49
  Bottom 0.406: 3,49 3,41
S$253  (via drill 2.8)
  other vias: 8.89,48.51
S$254  (via drill 2.8)
  other vias: 2.92,48.51
S$255  (via drill 2.8)
  other vias: 5.97,53.34
S$256  (via drill 2.8)
  other vias: 10.79,58.04
S$257  (via drill 2.8)
  other vias: 16.76,58.04
S$258  (via drill 2.8)
  other vias: 13.84,62.87
S$259  (via drill 2.8)
  other vias: 32.26,58.8
S$260  (via drill 2.8)
  other vias: 35.18,53.98
S$261  (via drill 2.8)
  other vias: 40.77,92.08
S$262  (via drill 2.8)
  other vias: 34.8,92.08
S$263  (via drill 2.8)
  other vias: 37.85,96.9
S$264
  Top 0.406: 40.01,90.55 39.24,87.5 34.92,81.53 33.78,81.53
  Bottom 0.406: 30.99,93.09 31.24,93.09 32,92.33 32,90.3 33.91,88.39 37.85,88.39 40.01,90.55
S$265  (via drill 2.8)
  other vias: 64.01,95
S$266  (via drill 2.8)
  other vias: 60.96,90.17
S$267
  Bottom 0.406: 59.18,79.09 64.9,74.93 66.04,72.66 66.04,44.83
S$268
  Bottom 3.81: 46.48,40.39 61.72,40.39
S$269
  Bottom 2.184: 53.59,69.47 53.21,78.23
S$270
  Bottom 0.305: 49.4,42.16 49.4,48.77 50.16,49.78
S$271
  Bottom 0.305: 51.94,42.29 51.94,50.04
S$272
  Bottom 0.305: 54.48,42.16 54.36,50.04
S$273
  Bottom 0.305: 57.02,42.16 57.02,49.78
S$274
  Bottom 0.305: 59.56,42.29 59.56,50.04
S$275
  Bottom 0.305: 61.98,49.78 62.1,41.15
S$276
  Top 0.305: 64.57,46.99 64.64,42.29
  Bottom 0.305: 62.99,41.02 64.64,42.42 64.52,49.53
S$277
  Top 0.61: 61.85,47.62 63.75,47.62 64.39,46.99
  Top 1.27: 49.78,48.13 56.01,48.13 58.67,50.8 61.85,47.62
S$278
  Top 2.184: 50.67,37.97 50.67,39.24 49.91,40.01
S$279
  Top 0.305: 62.1,42.04 62.1,47.37
S$280
  Top 0.305: 59.56,41.91 59.56,49.28
S$281
  Top 0.305: 57.02,42.04 57.02,48.64
S$282
  Top 0.305: 54.48,41.91 54.48,47.62
S$283
  Top 0.305: 51.94,41.91 51.94,48.01
S$284
  Top 0.305: 49.4,41.91 49.4,47.88
S$285  (via drill 0.6)
  Top 1.016: v58.67,50.67 69.47,50.67 69.34,50.55 69.34,42.93 67.44,41.02 67.06,41.02 66.8,41.02 64.39,41.02
S$286
  Bottom 1.016: 72.77,60.71 73.03,60.96
S$287
  Bottom 1.016: 73.15,58.29 73.15,55.75 47.C
S$288
  Top 1.016: 73.15,58.29 73.15,55.5 72.52,54.86
S$289
  Top 0.406: 53.72,50.55 53.85,50.55
S$290  (via drill 0.6)
  other vias: 60.33,11.56
S$291  (via drill 0.6)
  other vias: 38.61,11.68
S$292  (via drill 0.6)
  other vias: 40.64,11.68
S$293  (via drill 0.6)
  other vias: 62.36,11.56
S$294  (via drill 0.6)
  other vias: 53.21,11.43
S$295  (via drill 0.6)
  other vias: 51.31,11.43
S$296  (via drill 0.6)
  other vias: 62.36,13.59
S$297  (via drill 0.6)
  other vias: 60.33,13.59
S$298
  Top 0.305: 21.87,64.42 23.38,66.94
S$299
  Top 0.305: 24.53,68.47 26.42,72.9
S$300
  Top 0.305: 18.03,58.67 20.61,62.91
S$301
  Bottom 0.61: 14,85 28.5,93.5
S$302
  Top 0.305: 11,93 11,92.5
S$303
  Top 0.305: 11,90 11,89
S$304
  Bottom 0.61: 2.5,59 2.5,61 3,61.5
S$305
  Bottom 0.305: 2.92,92.08 3.81,91.19 6.86,91.19 7.49,90.55
S$306  (via drill 0.6)
  other vias: 7.75,90.55
S$307
  Top 0.305: 8.13,90.3 9.53,88.77 31.62,88.77 31.75,89.15 31.5,88.9 31.75,88.52 31.88,88.27 | 31.88,92.71 31.88,89.41 | 31.88,89.41 31.37,89.03 9.02,89.03 6.86,91.19 3.81,91.19 3.05,91.95 | 31.88,89.41 31.88,88.27 | 31.88,88.27 31.88,86.23 33.4,81.79
S$308  (via drill 0.6)
  other vias: 20.7,88.9
S$309  (via drill 0.6)
  other vias: 8.13,87.25
S$310
  Bottom 0.305: 5.21,87.38 8.13,87.38
S$311
  Top 1.27: 50.31,4.06 50.31,5.83
S$312
  Bottom 1.016: 50.29,4.07 50.3,5.27
S$313
  Bottom 0.254: 46.83,45.72 46.85,40.27
S$314
  Bottom 0.254: 46.83,45.74 47.3,47.86 49.88,49.82
S$315
  Top 2.184: 40.51,46.74 40.51,41.02
  Bottom 2.184: 40.51,41.02 40.51,46.74
S$316  (via drill 2.2)
  other vias: 62.48,63.25
S$317  (via drill 2.2)
  other vias: 62.23,70.74
S$318  (via drill 0.6)
  Top 1.016: 73.03,60.96 72.9,60.96 v64.52,59.31
  Bottom 1.016: 63.12,57.15 v64.52,59.31
S$319
  Bottom 6.452: 95,6 97,4 97,3
S$320
  Top 6.452: 12,42 12,13 15,10 15,8 20,3 33,3 33,5 32,6 20,6 17,3 3,3 3,30 8,35 8,37 9,38 9,8 8,7 10,7 11,6
  Bottom 6.452: 33,3 3,3 3,28 6,31 6,32 9,35 | 9,35 9,38 | 9,35 9,7 10,6 15,6 | 32,6 15,6 | 15,6 16,7 16,8 13,11 13,14 12,15 12,42
S$321
  Top 2.54: 88,41 74,57
  Bottom 2.54: 74,57 88,41
S$322
  Top 0.61: 38,46 39,48 40,49 42,54
S$323
  Top 0.61: 42,49 44,54 43,50 43,49 | 42,49 41,47 42,48 | 43,49 42,49 | 42,49 42,48 | 42,48 43,49
S$324  (via drill 0.6)
  Top 0.61: 17,39 17,45 28,50 36,50 | 17,39 26,33 26,32 26,30 17,37 | 17,38 17,39
  Top 1.27: 25,32 17,37 17,38 | 17,38 26,32 | 25,49 17,45 17,38 | 25,49 v27,50 36,50 | v35,49 25,49
  Bottom 1.27: v27,50 17,45 17,38 26,32
S$325
  Bottom 1.27: 34,75 50,98 59,85 58,85 | 58,85 57,85 | 57,85 56,85 | 56,85 44,85 | 43,85 42,85 50,97 58,85 | 58,85 43,86 50,96 57,85 | 57,85 44,87 50,95 56,85 | 56,85 45,88
  Bottom 3.81: 35,76 43,85 44,85 44,80 40,80
  Bottom 6.452: 45,88 50,93 53,88 47,88
S$326  (via drill 0.6)
  other vias: 25,50
S$327
  Bottom 1.27: 36,49 39,52 39,59 | 36,49 34,49 | 34,49 35,48 36,49 | 36,49 35,50 34,49
S$328
  Bottom 1.27: 40,42 36,42 | 36,42 31,42 31,56 | 32,57 32,46 | 32,46 32,44 | 32,44 32,41 | 36,42 32,46 | 32,46 34,43 33,43 32,44
S$329
  Bottom 0.254: 45.52,78.6 49.79,79.53
S$330
  Bottom 1.27: 58,84 49,85
S$331
  Top 3.81: 50,98 35,76
S$332
  Top 3.81: 12,45 33,74 | 28,60 29,65 19,52
  Bottom 3.81: 33,74 13,45 29,65 28,60
S$333
  Top 3.81: 30,58 20,52
S$334  (via drill 0.6, 3.2)
  Top 1.27: 35,75 39,79 v40,79 34,73 | 35,75 34,74 30,66 30,65 30,60 31,60 31,67 34,73 | 34,73 35,75
  Top 3.81: 23,54 30,54 30,59 32,59 30,65 | 39,79 41,79 44,89 46,91 54,91 56,90 51,96 v50,92
  Bottom 0.254: 45.73,79 50.38,79.36
  Bottom 1.27: 45.73,79 v40,79
  Bottom 3.81: 30,65 32,59 | 32,59 30,54 23,54 20,52 32,59
S$335
  Bottom 1.422: 39,68 39,58
S$336
  Top 1.422: 39,68 39,61
S$337  (via drill 0.6)
  other vias: 50,53.22
S$338  (via drill 1.6)
  other vias: 76,93.5
S$339  (via drill 1.6)
  other vias: 73,93.5
S$340
  Top 1.422: 47.75,80.76 44.73,78.76 43.97,69
S$341
  Top 1.422: 91,36 91,41 93,38 92,38
  Bottom 1.422: 92,38 91,41 | 91,41 91,37 93,38 91,41
S$342
  Top 1.422: 69,32 69,23 70,23 70,32 69,32
  Bottom 1.422: 69,23 69,32 70,32 70,23
S$343
  Top 1.422: 33,26 35,28 | 35,28 35,25 34,25 | 34,25 31,25 31,28 35,28 | 35,28 34,25 | 34,25 32,26 32,27 33,27
  Bottom 1.422: 31,25 31,28 35,28 35,25 32,25 32,27 34,27 34,26 33,26
S$344
  Top 1.27: 60,84 65,77 61,75 54,69 55,71 | 55,71 55,77 60,77 61,78 61,82 64,77 62,80 63,77 62,79 62,76 61,77 55,71 | 55,71 61,76 56,76 56,73 58,75 57,75
  Top 1.422: 56,88 56,84 60,84 57,89 57,85 59,85 58,86
S$345
  Top 0.406: 46.23,62.74 44.7,62.74
S$346
  Top 0.813: 51.31,58.42 51.31,60.96
S$347  (via drill 0.6)
  other vias: 54,59
S$348  (via drill 0.6)
  Top 0.813: 39.37,56.9 v45.47,56.9 v45.47,55.63 39.37,55.63 40.13,56.39 44.7,56.39 44.96,56.13
S$349  (via drill 1.6)
  other vias: 70,93.5
S$350
  Bottom 0.813: 45.72,56.9 52.07,56.9 54.1,58.93
S$351
  Top 0.406: 96.39,95.5 96.39,93.85 | 91.01,96.6 91.25,96.48 93,95.87 91.48,96.36 93.09,95.89 96.01,95.89 | 96.01,95.89 96.39,95.5 | 96.39,95.5 97.28,94.61 | 96.01,95.89 97.16,97.03
S$352
  Bottom 0.813: 45.21,56.39 52.32,56.39 54.36,58.42 54.36,57.66 52.32,55.63 45.21,55.63
S$353  (via drill 0.6)
  Top 0.813: v54.61,57.66 54.61,58.42 54.1,58.93 54.1,57.91 54.36,57.66 v54.61,57.66
S$354
  Bottom 1.27: 54,74 57,74 54,71 55,73
S$355  (via drill 0.6)
  Top 0.813: v50.04,66.29 50.04,53.34
S$356  (via drill 1.6)
  other vias: 39,68
S$357  (via drill 0.6, 1)
  Top 0.406: v48.01,73.91 49.53,73.91 v50.55,74.93
  Bottom 0.406: v50.55,74.93 52.83,74.93 v54.86,76.96
S$358
  Bottom 0.813: 86.23,94.36 85.47,93.22 85.09,94.87 | 85.09,94.87 80.9,97.66 | 85.09,94.87 85.85,94.61 85.85,92.46
S$359
  Top 0.813: 90.3,96.77 86.74,96.77 83.44,98.04 90.81,96.9
S$360  (via drill 1.6)
  other vias: 76,96.5
S$361  (via drill 1.6)
  other vias: 73,96.5
S$362  (via drill 1.6)
  other vias: 70,96.5
S$363
  Bottom 0.813: 73,97 80.49,96.49 83.5,94.5 83.5,93.5
S$364  (via drill 0.6)
  Bottom 0.813: v65.5,88.5 68.5,88.5 73,93
S$365
  Bottom 1.676: 72.5,85.5 75,85.5 76,84.5 79,84.5 | 80,84.5 79,84.5 | 79,84.5 78,83.5
S$366
  Top 1.676: 72.5,88.5 72.5,90.5
S$367
  Top 1.676: 80,90.5 80,87.5 78.5,87.5 75.5,84.5 75.5,82
S$368
  Top 1.676: 72,88.5 74,88.5 76.5,86 76.5,86.5 79,89 79,90 74.5,90 | 73.5,90 74.5,90 | 74.5,90 76.5,88 77.5,89
S$369  (via drill 0.6)
  other vias: 91.5,94.5
S$370
  Top 1.676: 88.5,86.5 88.5,90.5 86,93 86,90.5 86.5,90.5 87.5,89.5
S$371
  Bottom 1.016: 62.36,70.87 62.74,71.75
  Bottom 1.676: 54.36,63.25 62.36,70.87
S$372
  Top 1.676: 78.5,91.5 84,91.5 84.5,92 | 84.5,92 85,92.5 85,92 84,91 | 84.5,92 86,92
S$373  (via drill 2)
  other vias: 26.29,85.09
S$374  (via drill 2)
  other vias: 26.29,73.15
S$375  (via drill 2)
  other vias: 14.1,73.15
S$376  (via drill 2)
  other vias: 12.06,79.12
S$377  (via drill 2)
  other vias: 14.1,85.09
S$378  (via drill 0.6)
  other vias: 19.18,67.06
(copper drawn outside any net)
  shapes: Bottom area x35, Top area x27

## Text on the board
Dimension: power / detected | rebooting
tNames: PNP | 33uH | G5LE 5v relay | S V G | S V G | off on | 15uH | PNP | 8.4v | S V G | - + | + -
bNames: + - | Bat- | Power - | Bat+ | Power+ | BALANCE | - +